# EAGLE board Tesseract_STEPPER_Routed (EAGLE 7.7.0)
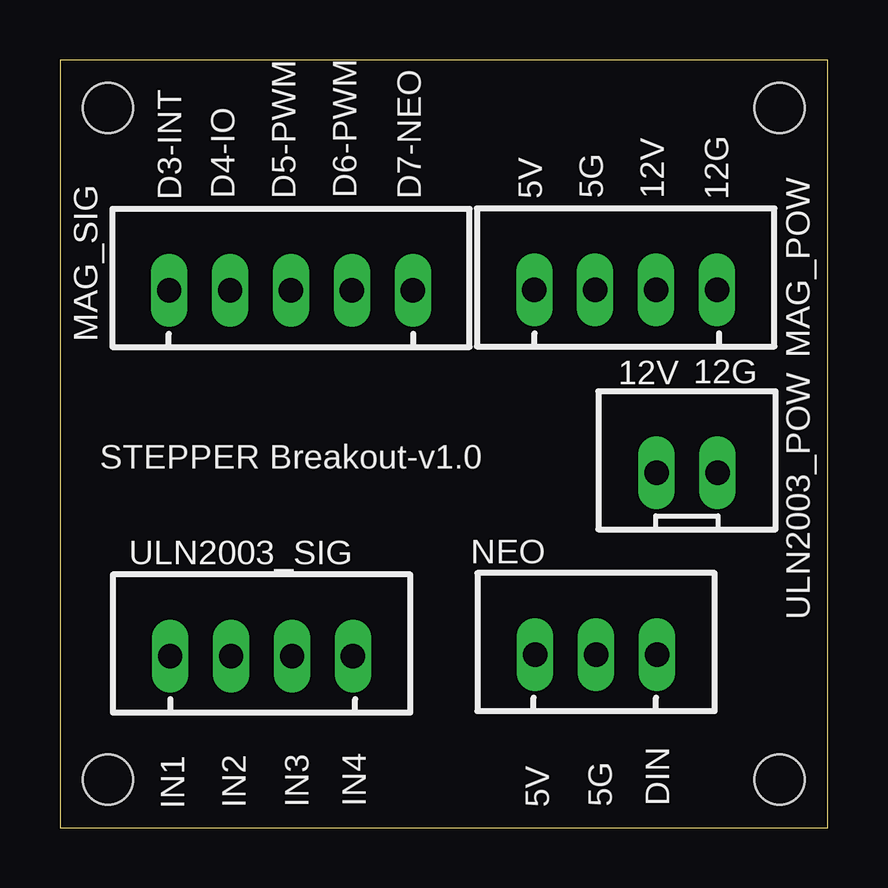
[diagram p0: board, top side]
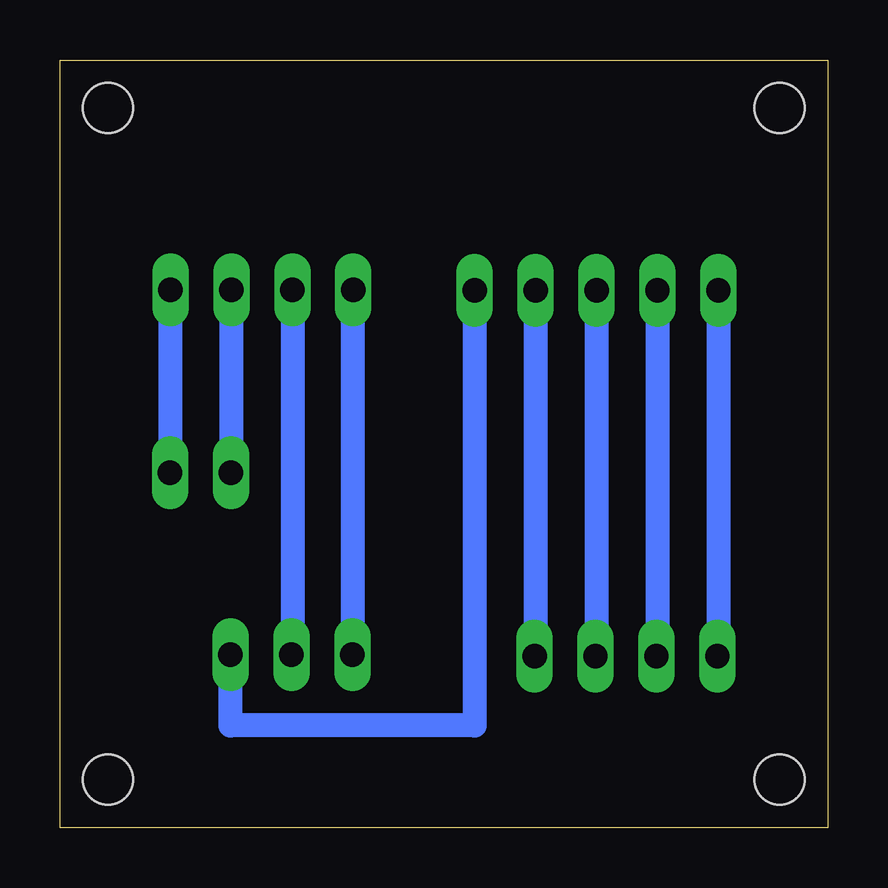
[diagram p1: board, bottom side, seen from below]

Size 32 x 32 mm. Coordinates in mm from the lower left corner, seen from the top.
Outline: 0,0 32,0 32,32 0,32 0,0
Copper layers (1*16): Top 0.035mm / dielectric 1.5mm / Bottom 0.035mm
Design rules "default": minimum track width 10mil, minimum drill 24mil, track to track 8mil, track to pad 8mil, pad to pad 8mil, via to via 8mil, smd to smd 8mil, copper to edge 40mil, drill to drill 8mil, minimum pad ring 10mil, minimum via ring 8mil, stop-mask expansion 4mil, vias tented up to drill 0mil, thermal gap 10mil
Holes 2.1 mm at 30,2 2,2 30,30 2,30

## Footprints (pad centres in the part's own frame; a part is rotated, then mirrored left to right if it is on the bottom)
JST-XH-04-PACKAGE-LONG-PAD = drill 1.016 long: 1 -3.81,0; 2 -1.27,0; 3 1.27,0; 4 3.81,0
JST-XH-05-PACKAGE-LONG-PAD = drill 1.016 long: 1 -5.08,0; 2 -2.54,0; 3 0,0; 4 2.54,0; 5 5.08,0
JST-XH-03-PACKAGE-LONG-PAD = drill 1.016 long: 1 -2.54,0; 2 0,0; 3 2.54,0
JST-XH-02-PACKAGE-LONG-PAD = drill 1.016 long: 1 -1.27,0; 2 1.27,0

## Placement (x,y rotation side)
MAG_POW  [JST-XH-04-PACKAGE-LONG-PAD]  23.58,22.41 0 top
MAG_SIG  [JST-XH-05-PACKAGE-LONG-PAD]  9.63,22.39 0 top
NEO  [JST-XH-03-PACKAGE-LONG-PAD]  22.35,7.21 0 top
U$15  [12X12]  16,30 0 top
ULN2003_POW  [JST-XH-02-PACKAGE-LONG-PAD]  26.14,14.79 0 top
ULN2003_SIG  [JST-XH-04-PACKAGE-LONG-PAD]  8.41,7.15 0 top

## Library data of the parts
MAG_POW MAG_SIG NEO ULN2003_POW ULN2003_SIG = Rembrandt Electronics - JST XH Connectors v1-0
U$15 = pinhead_1x14_no_frame MOD

## Nets
5V_GND: MAG_POW.2 NEO.2
5V_VCC: MAG_POW.1 NEO.1
12V_GND: MAG_POW.4 ULN2003_POW.2
12V_VCC: MAG_POW.3 ULN2003_POW.1
PIN3: MAG_SIG.1 ULN2003_SIG.1
PIN4: MAG_SIG.2 ULN2003_SIG.2
PIN5: MAG_SIG.3 ULN2003_SIG.3
PIN6: MAG_SIG.4 ULN2003_SIG.4
PIN7: MAG_SIG.5 NEO.3

## Tracks (layer width: path | path; a pad name or v marks a point on that pad's centre or on a via)
5V_GND
  Bottom 0.406: 22.31,7.21 NEO.2
  Bottom 1: MAG_POW.2 22.31,7.21
5V_VCC
  Bottom 0.406: MAG_POW.1 19.81,22.41
  Bottom 1: 19.81,22.41 NEO.1
12V_GND
  Bottom 0.406: MAG_POW.4 27.41,22.41
  Bottom 1: 27.41,22.41 ULN2003_POW.2
12V_VCC
  Bottom 0.406: MAG_POW.3 24.87,22.41
  Bottom 1: 24.87,22.41 ULN2003_POW.1
PIN3
  Bottom 0.406: 4.55,7.15 ULN2003_SIG.1
  Bottom 1: MAG_SIG.1 4.55,7.15
PIN4
  Bottom 0.406: 7.09,7.15 ULN2003_SIG.2
  Bottom 1: MAG_SIG.2 7.09,7.15
PIN5
  Bottom 0.406: 9.63,7.15 ULN2003_SIG.3
  Bottom 1: MAG_SIG.3 9.63,7.15
PIN6
  Bottom 0.406: 12.17,7.15 ULN2003_SIG.4
  Bottom 1: MAG_SIG.4 12.17,7.15
PIN7
  Bottom 0.406: NEO.3
  Bottom 1: MAG_SIG.5 14.71,4.25 24.89,4.25 NEO.3

## Text on the board
tNames: D3-INT | D4-IO | D5-PWM | D6-PWM | D7-NEO | 5V | 5G | 12V | 12G | 12G | 12V | STEPPER Breakout-v1.0 | IN1 | IN2 | IN3 | IN4 | 5V | 5G | DIN